# EAGLE board School System PCB (EAGLE 7.6.0)
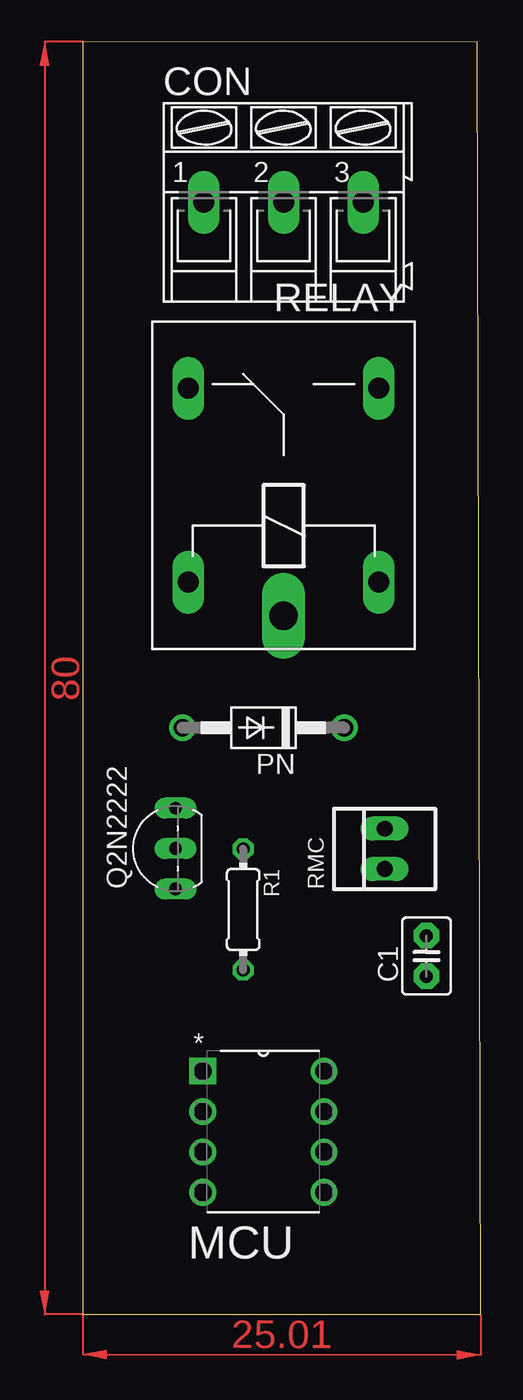
[diagram p0: board, top side]
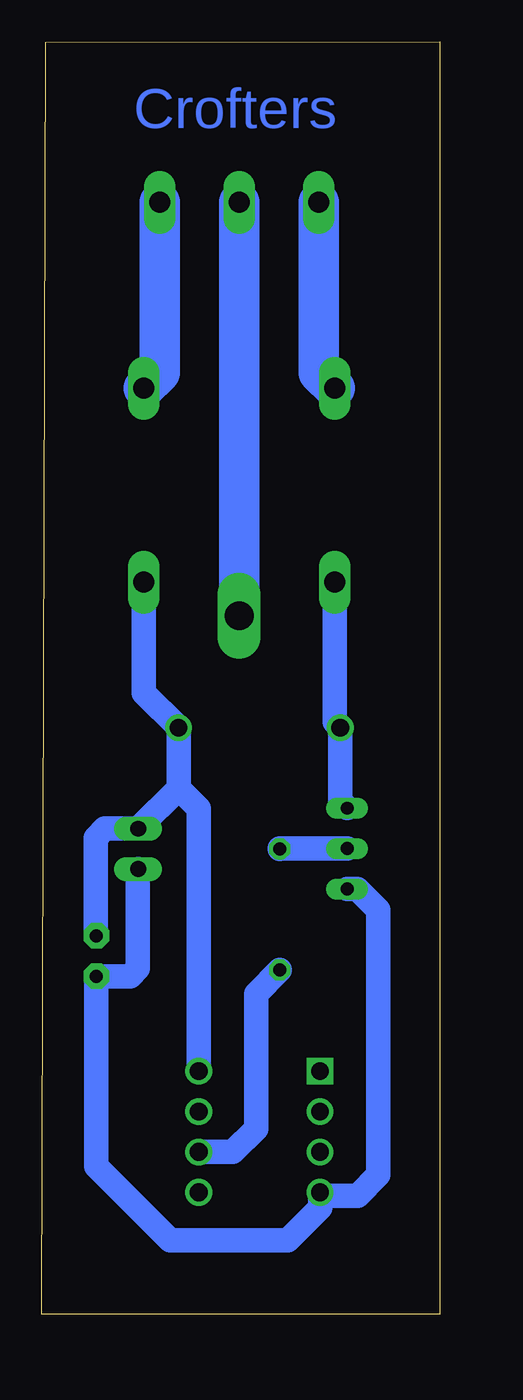
[diagram p1: board, bottom side, seen from below]

Size 25.01 x 80 mm. Coordinates in mm from the lower left corner, seen from the top.
Outline: 0,0 25.01,0 24.77,79.97 0,80 0,0
Copper layers (1*16): Top 0.035mm / dielectric 1.5mm / Bottom 0.035mm
Design rules "default": minimum track width 60mil, minimum drill 24mil, track to track 25mil, track to pad 35mil, pad to pad 8mil, via to via 8mil, smd to smd 8mil, copper to edge 40mil, drill to drill 8mil, minimum pad ring 10mil, minimum via ring 8mil, stop-mask expansion 4mil, vias tented up to drill 0mil, thermal gap 10mil

## Footprints (pad centres in the part's own frame; a part is rotated, then mirrored left to right if it is on the bottom)
C2.5-3 = drill 0.813 pad 1.6 octagon: 1 -1.27,0; 2 1.27,0
AK300/3 = drill 1.321 long: 1 -5.004,0; 2 0,0; 3 5.004,0
DIP254P762X533-8 = drill 1.118 square: 1 -7.62,7.62 | drill 1.118: 2 -7.62,5.08; 3 -7.62,2.54; 4 -7.62,0; 5 0,0; 6 0,2.54; 7 0,5.08; 8 0,7.62
DO41-10 = drill 1.118: A 5.08,0; C -5.08,0
TO92-EBC = drill 0.813 long: B 0,-1.27; C 2.54,-1.27; E -2.54,-1.27
0204/7 = drill 0.813 octagon: 1 -3.81,0; 2 3.81,0
ZF112 = drill 1.321 long: 1 -6.096,5.994; 2 -6.096,-5.994; O 6.096,5.994; S 6.096,-5.994 | drill 1.803 long: P -8.204,0
22-23-2021 = drill 1 long: 1 -1.27,0; 2 1.27,0

## Placement (x,y rotation side)
C1  0.1uF  [C2.5-3]  21.59,22.53 90 top
CON  [AK300/3]  12.61,69.91 0 top
MCU  ATTINY45-20PU  [DIP254P762X533-8]  15.15,7.68 0 top
PN  1N4007  [DO41-10]  11.34,36.89 180 top
Q2N2222  [TO92-EBC]  4.55,29.28 90 top
R1  10k  [0204/7]  10.07,25.46 270 top
RELAY  5v  [ZF112]  12.61,52.13 90 top
RMC  [22-23-2021]  18.96,29.27 90 top

## Library data of the parts
C1 = capacitor-wima
CON = con-ptr500; OC_FARNELL: unknown; OC_NEWARK: unknown
MCU = Atmel_By_element14_Batch_1-00; MPN: ATTINY45-20PU; OC_FARNELL: 1288352; OC_NEWARK: 23M5072; PACKAGE: PDIP-8; SUPPLIER: Atmel
PN = diode
Q2N2222 = transistor-neu-to92
R1 = resistor
RELAY = relay; OC_FARNELL: unknown; OC_NEWARK: unknown
RMC = con-molex; MF: MOLEX; MPN: 22-23-2021; OC_FARNELL: 1462926; OC_NEWARK: 25C3832

## Nets
N$1: C1.2 MCU.8 PN.C RELAY.2 RMC.2
N$2: C1.1 MCU.4 Q2N2222.E RMC.1
N$3: MCU.6 R1.2
N$4: Q2N2222.B R1.1
N$5: PN.A Q2N2222.C RELAY.1
N$7: CON.2 RELAY.P
N$8: CON.3 RELAY.S
N$9: CON.1 RELAY.O

## Tracks (layer width: path | path; a pad name or v marks a point on that pad's centre or on a via)
N$1
  Bottom 1.524: RELAY.2 18.6,39.07 PN.C 16.42,33.08 | 16.42,33.08 RMC.2 21.04,30.54 21.62,29.96 21.62,23.84 C1.2 | MCU.8 15.15,31.81 16.42,33.08
N$2
  Bottom 1.524: Q2N2222.E 5.18,26.75 3.87,25.44 3.87,8.77 5.17,7.47 7.33,7.47 MCU.4 7.53,6.7 9.55,4.68 16.94,4.68 21.59,9.32 C1.1 19.45,21.26 18.98,21.74 18.98,27.98 RMC.1
N$3
  Bottom 1.524: MCU.6 13.01,10.22 11.55,11.67 11.55,20.16 R1.2
N$4
  Bottom 1.524: Q2N2222.B 10.05,29.29 R1.1
N$5
  Bottom 1.524: RELAY.1 6.61,37.24 PN.A 6.26,32.26 Q2N2222.C
N$7
  Bottom 2.54: CON.2 RELAY.P
N$8
  Bottom 2.54: CON.3 17.61,59.21 RELAY.S
N$9
  Bottom 2.54: CON.1 7.61,59.21 RELAY.O
(copper drawn outside any net)
  shapes: Top area x2

## Text on the board
Top: C:/Users/Kondan/Desktop/logo.bmp
Bottom: Crofters